# EAGLE board Camera (EAGLE 9.6.2)
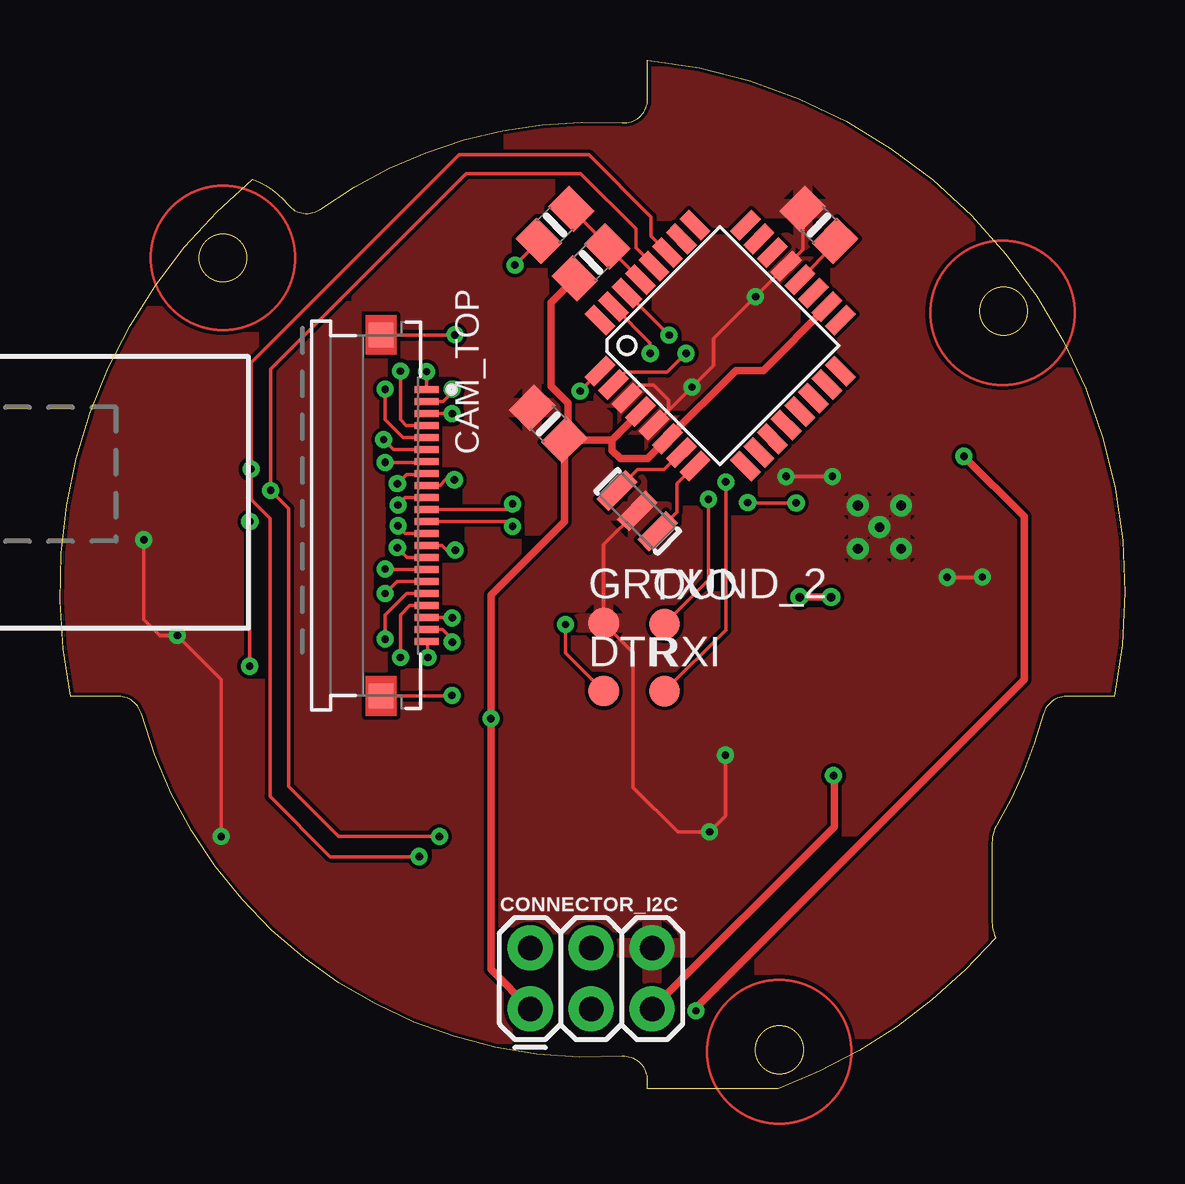
[diagram p0: board, top side]
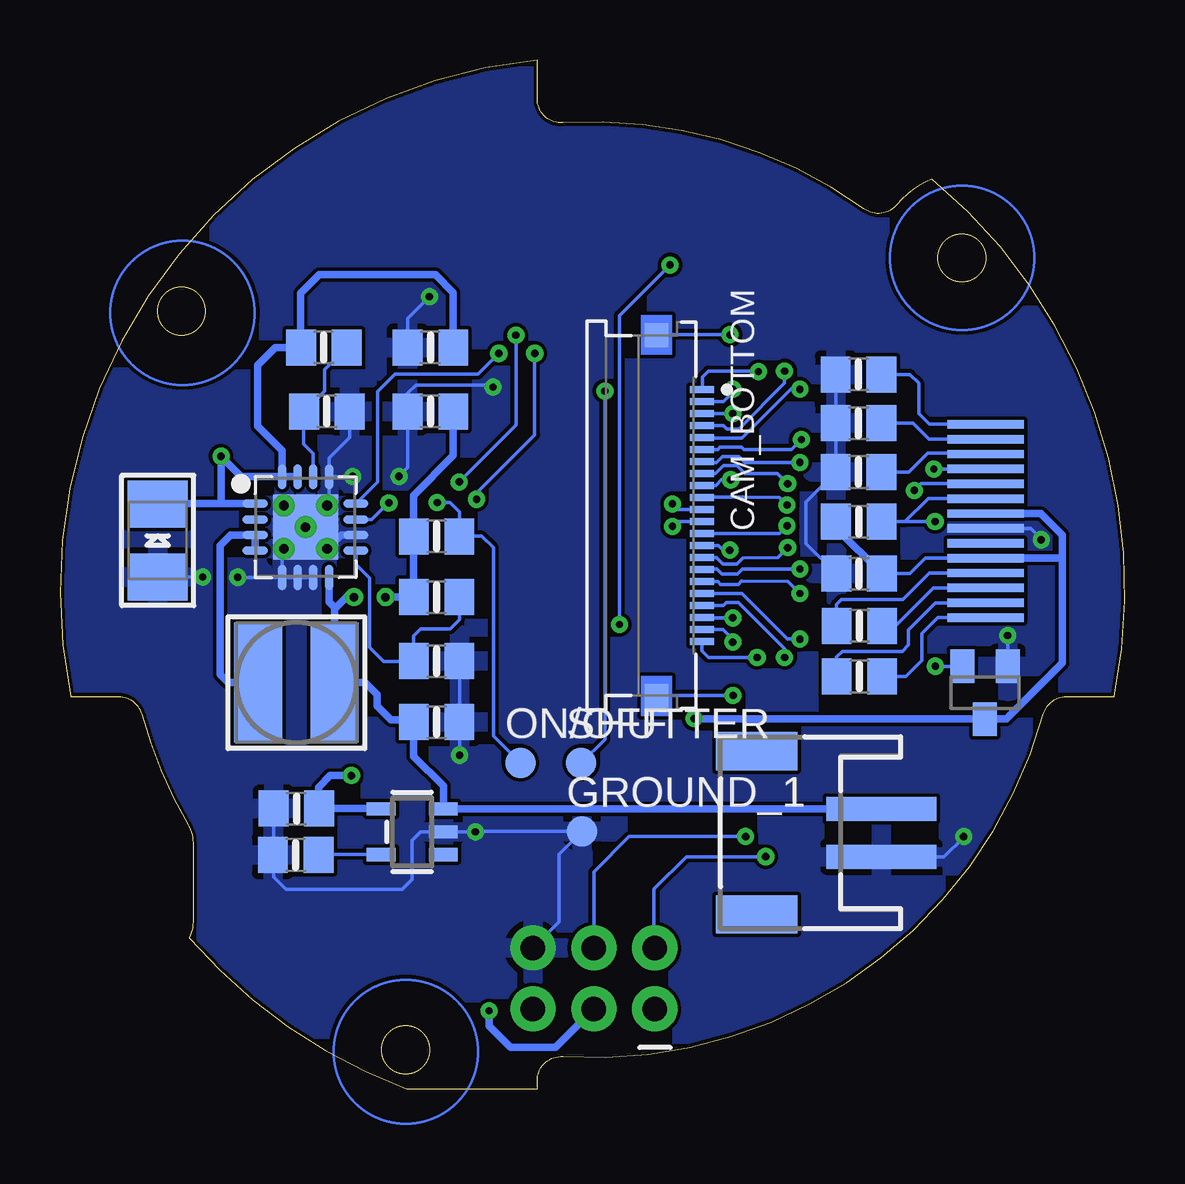
[diagram p1: board, bottom side, seen from below]

Size 44.39 x 42.88 mm. Coordinates in mm from the lower left corner, seen from the top.
Outline: 24.5,41.26 24.5,42.88 arc-96 43.94,16.35 41.96,16.35 arc75 40.99,15.62 arc-15 39.06,11 arc30 38.85,10.25 38.85,6.95 arc26 39,6.3 arc-29 29.95,0 24.5,0 24.5,0.34 arc94 23.43,1.34 arc-78 3.4,15.62 arc75 2.43,16.35 0.45,16.35 arc-62 8.04,37.9 arc-30 9.5,36.85 arc86 10.86,36.67 arc-39 23.43,40.26 arc94 24.5,41.26
Outline: circle at 6.79,34.63 radius 1
Outline: circle at 29.99,1.62 radius 1
Outline: circle at 39.33,32.41 radius 1
Copper layers (1*16): Top 0.035mm / dielectric 1.5mm / Bottom 0.035mm
Design rules "default *": minimum track width 6mil, minimum drill 0.3mm, track to track 6mil, track to pad 6mil, pad to pad 6mil, via to via 6mil, smd to smd 6mil, copper to edge 6mil, drill to drill 6mil, minimum pad ring 10mil, minimum via ring 8mil, stop-mask expansion 4mil, vias tented up to drill 0mil, thermal gap 10mil
Net classes: 0 default: width 0.203 mm; 1 vcc: width 0.254 mm

## Footprints (pad centres in the part's own frame; a part is rotated, then mirrored left to right if it is on the bottom)
JSTPH2 = smd 1 x 4.6: 1 -1,-3.7; 2 1,-3.7 | smd 1.6 x 3.4: NC1 -3.4,1.5; NC2 3.4,1.5
0805-NO = smd 1.24 x 1.5: 1 -0.95,0; 2 0.95,0
EIA3528-21/B-R = smd 1.95 x 2.5: + 1.525,0; - -1.525,0
MOLEX_54548-2271_0 = smd 0.3 x 1: 1 -5.25,0.95; 2 -4.75,0.95; 3 -4.25,0.95; 4 -3.75,0.95; 5 -3.25,0.95; 6 -2.75,0.95; 7 -2.25,0.95; 8 -1.75,0.95; 9 -1.25,0.95; 10 -0.75,0.95; 11 -0.25,0.95; 12 0.25,0.95; 13 0.75,0.95; 14 1.25,0.95; 15 1.75,0.95; 16 2.25,0.95; 17 2.75,0.95; 18 3.25,0.95; 19 3.75,0.95; 20 4.25,0.95; 21 4.75,0.95; 22 5.25,0.95 | smd 1 x 1: MP1 -7.525,-0.95; MP2 7.525,-0.95
2X3 = drill 1.016 pad 1.88: 1 0,0; 2 0,2.54; 3 2.54,0; 4 2.54,2.54; 5 5.08,0; 6 5.08,2.54
B1,27 = smd 1.27 x 1.27: TP 0,0
SOT23 = smd 1 x 1.4: 1 -0.95,-1.1; 2 0.95,-1.1; 3 0,1.1
INDUCTOR_5X5MM_TDK_VLC5045 = smd 2 x 5: P$1 -1.6,0; P$2 1.6,0
UG-2832HSWEG02_WRAPUNDER = smd 3.2 x 0.35 bottom: 1 -2.03,-5.3; 2 -2.03,-4.68; 3 -2.03,-4.06; 4 -2.03,-3.44; 5 -2.03,-2.82; 6 -2.03,-2.2; 7 -2.03,-1.58; 8 -2.03,-0.96; 9 -2.03,-0.34; 10 -2.03,0.28; 11 -2.03,0.9; 12 -2.03,1.52; 13 -2.03,2.14; 14 -2.03,2.76
RESONATOR-SMD = smd 0.7 x 1.7: 1 -1.2,0; 2 0,0; 3 1.2,0
PVQFN-16 = smd 1.05 x 0.35: 1 -2.1,0.975; 2 -2.1,0.325; 3 -2.1,-0.325; 4 -2.1,-0.975; 9 2.1,-0.975; 10 2.1,-0.325; 11 2.1,0.325; 12 2.1,0.975 | smd 0.35 x 1.05: 5 -0.975,-2.1; 6 -0.325,-2.1; 7 0.325,-2.1; 8 0.975,-2.1; 13 0.975,2.1; 14 0.325,2.1; 15 -0.325,2.1; 16 -0.975,2.1 | drill 0.4: P$18 0,0; P$19 -0.9,0.9; P$20 0.9,0.9; P$21 0.9,-0.9; P$22 -0.9,-0.9 | smd 2.7 x 2.7: THERMAL 0,0
SOT23-5 = smd 0.55 x 1.2: 1 -0.95,-1.3; 2 0,-1.3; 3 0.95,-1.3; 4 0.95,1.3; 5 -0.95,1.3
TQFP32-08 = smd 1.27 x 0.559: 1 -4.293,2.8; 2 -4.293,2; 3 -4.293,1.2; 4 -4.293,0.4; 5 -4.293,-0.4; 6 -4.293,-1.2; 7 -4.293,-2; 8 -4.293,-2.8; 17 4.293,-2.8; 18 4.293,-2; 19 4.293,-1.2; 20 4.293,-0.4; 21 4.293,0.4; 22 4.293,1.2; 23 4.293,2; 24 4.293,2.8 | smd 0.559 x 1.27: 9 -2.8,-4.293; 10 -2,-4.293; 11 -1.2,-4.293; 12 -0.4,-4.293; 13 0.4,-4.293; 14 1.2,-4.293; 15 2,-4.293; 16 2.8,-4.293; 25 2.8,4.293; 26 2,4.293; 27 1.2,4.293; 28 0.4,4.293; 29 -0.4,4.293; 30 -1.2,4.293; 31 -2,4.293; 32 -2.8,4.293

## Placement (x,y rotation side)
B1  1.8-5V  [JSTPH2]  13.85,10.67 90 bottom
C1  10uF  [0805-NO]  28.95,28.23 180 bottom
C2  2.2uF  [0805-NO]  28.95,30.9 180 bottom
C3  1uF  [0805-NO]  11.07,17.18 0 bottom
C4  0.1uF  [0805-NO]  28.7,15.28 0 bottom
C5  100uF/6V  [EIA3528-21/B-R]  40.32,22.85 90 bottom
C6  10µF  [0805-NO]  34.54,11.67 180 bottom
C7  1uF  [0805-NO]  11.07,19.29 0 bottom
C8  10uF  [0805-NO]  11.08,21.46 0 bottom
C9  10uF  [0805-NO]  11.11,29.77 0 bottom
C10  10uF  [0805-NO]  11.11,27.74 0 bottom
C11  0.1uF  [0805-NO]  31.63,36 315 top
C12  0.1uF  [0805-NO]  20.35,27.71 315 top
C13  0.1uF  [0805-NO]  20.63,36 225 top
CAM_BOTTOM  MOLEX_54548-2271MOLEX_54548-2271_0_0  [MOLEX_54548-2271_0]  18.58,23.9 270 bottom
CAM_TOP  MOLEX_54548-2271MOLEX_54548-2271_0_0  [MOLEX_54548-2271_0]  14.33,23.9 270 top
CONNECTOR_I2C  FEMALE 2x3  [2X3]  19.6,3.33 0 top
DTR  TPB1,27  [B1,27]  22.67,16.58 0 top
GROUND_1  TPB1,27  [B1,27]  22.64,10.72 0 bottom
GROUND_2  TPB1,27  [B1,27]  22.67,19.41 0 top
IC5  APX803  [SOT23]  5.84,16.5 180 bottom
L1  VLC5045-6.8uH  [INDUCTOR_5X5MM_TDK_VLC5045]  34.54,16.93 180 bottom
LCD1  OLED 128x32  [UG-2832HSWEG02_WRAPUNDER]  7.84,24.94 0 top
ON/OFF  TPB1,27  [B1,27]  25.21,13.58 0 bottom
Q2  8MHz  [RESONATOR-SMD]  24.06,24.08 135 top
R1  1.87Mohm  [0805-NO]  28.7,20.49 180 bottom
R2  340K  [0805-NO]  28.7,17.82 180 bottom
R3  1.87Mohm  [0805-NO]  33.4,30.9 180 bottom
R4  200K  [0805-NO]  33.27,28.23 180 bottom
R8  2k  [0805-NO]  34.57,9.74 180 bottom
R9  10K  [0805-NO]  22.13,34.44 225 top
R13  340K  [0805-NO]  28.7,23.03 0 bottom
R16  390K  [0805-NO]  11.11,25.71 0 bottom
R17  10K  [0805-NO]  11.1,23.63 180 bottom
RXI  TPB1,27  [B1,27]  25.21,16.57 0 top
SHUTTER  TPB1,27  [B1,27]  22.67,13.58 0 bottom
TXO  TPB1,27  [B1,27]  25.21,19.37 0 top
U1  TPS61090RSAR  [PVQFN-16]  34.16,23.41 0 bottom
U2  MCP73831T-2ACI/OT  [SOT23-5]  29.71,10.71 90 bottom
U3  ATMEGA328  [TQFP32-08]  27.52,30.97 45 top

## Library data of the parts
B1 C1-C13 L1 LCD1 R1-R4 R8 R9 R13 R16 R17 U1 U2 = microbuilder
CAM_BOTTOM CAM_TOP = Molex - 54548-2271; CIIVA_IDS: 3405268; CIRCUITS_LOADED: 22; COMPONENT_LINK_1_DESCRIPTION: Manufacturer URL; COMPONENT_LINK_1_URL: http://www.molex.com/molex/index.jsp; COMPONENT_LINK_3_DESCRIPTION: Package Specification; COMPONENT_LINK_3_URL: http://www.molex.com/pdm_docs/sd/545482171_sd.pdf; CONTACT_POSITION: Bottom; CURRENT_MAX_PER_CONTACT: 0.5A; DATASHEET: http://www.molex.com/webdocs/datasheets/pdf/en-us/0545482271_FFC_FPC_CONNECTORS.pdf; DURABILITY_MATING_CYCLES_MAX: 20; ENTRY_ANGLE: 90degrees Angle; FOOTPRINT_VARIANT_NAME_0: Manufacturer Recommended; IMPORTED: yes; IMPORTED_FROM: vault; IMPORT_TS: 1521842921; MATED_HEIGHT: 1.20mm; MATERIAL___METAL: Phosphor Bronze; MATERIAL___PLATING_MATING: Gold; MATERIAL___PLATING_TERMINATION: Tin; MF: Molex; MOUNTING_TECHNOLOGY: Surface Mount; MPN: 54548-2271; NUMBER_OF_ROWS: 1; ORIENTATION: Right Angle; PACKAGE: 54548-2271; PACKAGE_DESCRIPTION: 22-Lead FPC Connector, Pitch 0.5 mm; PACKAGE_VERSION: Rev. N, 06/2008; PACKING: Tape and Reel; PCB_LOCATOR: No; PCB_RETENTION: Yes; PITCH___MATING_INTERFACE: 0.50mm; POLARIZED_TO_PCB: Yes; PREFIX: J; RELEASE_DATE: 1411372733; ROHS: Yes; STACKABLE: No; VAULT_GUID: 920E7395-0F54-4537-85AD-D56E07D5A003; VAULT_REVISION: 20E50B2D-1E80-4777-BC1D-DF1542527B45; VOLTAGE_MAX: 50V
CONNECTOR_I2C = SparkFun-Connectors; PROD_ID: CONN-11566
DTR GROUND_1 GROUND_2 ON/OFF RXI SHUTTER TXO = testpad
IC5 = adafruit
Q2 U3 = SparkFun

## Nets
3.3V: C8.2 C12.2 CONNECTOR_I2C.1 IC5.3 LCD1.5 LCD1.8 R9.2 R17.2 U3.4 U3.6 U3.18
5.0V: C2.1 C5.+ CONNECTOR_I2C.3 R3.2 U1.1 U1.15 U1.16
!OLED_RST: IC5.2 LCD1.9 R17.1
A0: U3.23
A1: U3.24
A2: U3.25
A3: U3.26
A4/SDA: CONNECTOR_I2C.2 LCD1.11 U3.27
A5/SCL: CONNECTOR_I2C.4 LCD1.10 U3.28
AREF: C11.2 U3.20
D2: U3.32
D3: SHUTTER.TP U3.1
D4: U1.12 U3.2
D5: U3.9
D6: U3.10
D7: U3.11
D8: U3.12
D9: U3.13
D10: U3.14
DTR: C13.2 DTR.TP
ENABLE: ON/OFF.TP R13.2 U1.11
GND: B1.1 C1.2 C2.2 C4.2 C5.- C6.2 C8.1 C9.1 C10.1 C11.1 C12.1 CONNECTOR_I2C.6 GROUND_1.TP GROUND_2.TP IC5.1 LCD1.7 Q2.2 R2.1 R4.1 R8.2 R16.1 U1.5 U1.6 U1.7 U1.10 U1.13 U1.P$18 U1.P$19 U1.P$20 U1.P$21 U1.P$22 U1.THERMAL U2.2 U3.3 U3.5 U3.21
MISO: U3.16
MOSI: U3.15
N$1: L1.P$2 U1.3 U1.4
N$2: CAM_BOTTOM.1 CAM_TOP.1
N$3: R1.1 R2.2 U1.9
N$4: CAM_BOTTOM.2 CAM_TOP.2
N$5: R3.1 R4.2 U1.14
N$6: CAM_BOTTOM.3 CAM_TOP.3
N$7: CAM_BOTTOM.4 CAM_TOP.4
N$8: R8.1 U2.5
N$9: CAM_BOTTOM.5 CAM_TOP.5
N$10: CAM_BOTTOM.6 CAM_TOP.6
N$11: C3.2 LCD1.1
N$12: C3.1 LCD1.2
N$13: C7.2 LCD1.3
N$14: C7.1 LCD1.4
N$15: C10.2 LCD1.13
N$16: LCD1.12 R16.2
N$17: C9.2 LCD1.14
N$18: Q2.1 U3.8
N$19: Q2.3 U3.7
N$20: CAM_BOTTOM.7 CAM_TOP.7
N$21: CAM_BOTTOM.8 CAM_TOP.8
N$22: CAM_BOTTOM.9 CAM_TOP.9
N$23: CAM_BOTTOM.10 CAM_TOP.10
N$24: CAM_BOTTOM.11 CAM_TOP.11
N$25: CAM_BOTTOM.12 CAM_TOP.12
N$26: CAM_BOTTOM.13 CAM_TOP.13
N$27: CAM_BOTTOM.14 CAM_TOP.14
N$28: CAM_BOTTOM.15 CAM_TOP.15
N$29: CAM_BOTTOM.16 CAM_TOP.16
N$30: CAM_BOTTOM.17 CAM_TOP.17
N$31: CAM_BOTTOM.18 CAM_TOP.18
N$32: CAM_BOTTOM.19 CAM_TOP.19
N$33: CAM_BOTTOM.20 CAM_TOP.20
N$34: CAM_BOTTOM.21 CAM_TOP.21
N$35: CAM_BOTTOM.22 CAM_TOP.22
N$36: CAM_BOTTOM.MP1 CAM_TOP.MP1
N$37: CAM_BOTTOM.MP2 CAM_TOP.MP2
RESET: C13.1 R9.1 U3.29
RXI: RXI.TP U3.30
SCK: U3.17
TXO: TXO.TP U3.31
VBAT: B1.2 C1.1 C4.1 L1.P$1 R1.2 R13.1 U1.8 U2.3
VBREF: LCD1.6
VDD1: C6.1 CONNECTOR_I2C.5 U2.4

## Tracks (layer width: path | path; a pad name or v marks a point on that pad's centre or on a via)
3.3V  (via drill 0.3)
  Top 0.305: CONNECTOR_I2C.1 17.96,4.97 v17.96,15.42 17.96,20.58 21.02,23.64 21.02,26.84 | 21.02,26.84 C12.2 23.02,27.04 | U3.4 23.02,27.04 | 23.02,27.04 23.02,26.6 23.36,26.26 24.5,26.26 U3.6 28.18,29.94 29.31,29.94 U3.18 | R9.2 20.46,32.77 20.46,29.28 21.17,28.57 21.17,27 21.02,26.84
  Bottom 0.152: C8.2 8.98,21.46 8.32,22.12 LCD1.5
  Bottom 0.305: v17.96,15.42 17.97,15.41 17.97,15.4 IC5.3 4.95,15.4 2.61,17.75 2.61,22.12 | 2.61,22.12 2.61,23.08 3.5,23.98 LCD1.8 | LCD1.5 2.61,22.12 | R17.2 12.05,23.38 C8.2
5.0V  (via drill 0.3)
  Top 0.305: v26.51,3.25 26.51,3.37 40.2,17.06 40.2,23.84 v37.68,26.36
  Bottom 0.305: U1.1 37.68,24.38 | 37.68,24.38 40.31,24.38 C5.+ | U1.16 35.13,26.6 36.16,27.63 36.16,30.17 35.43,30.9 R3.2 34.36,30.91 34.36,33.17 33.6,33.93 28.74,33.93 28,33.19 C2.1 | U1.16 U1.15 | CONNECTOR_I2C.3 23.75,1.72 25.62,1.72 26.51,2.61 v26.51,3.25 | 37.68,24.38 v37.68,26.36 36.83,25.51 U1.16
!OLED_RST  (via drill 0.3)
  Top 0.152: v7.9,17.61 7.9,23.63 v7.92,23.64
  Bottom 0.152: LCD1.9 8.21,24.6 9.17,23.63 R17.1 v7.92,23.64 | IC5.2 7.88,17.6 7.89,17.6 v7.9,17.61
A4/SDA  (via drill 0.3)
  Top 0.152: U3.27 24.65,35.54 24.65,36.33 22.04,38.93 16.63,38.93 7.97,30.27 v7.97,25.83 7.97,24.56 8.75,23.77 8.75,12.19 11.27,9.67 v14.98,9.67
  Bottom 0.152: LCD1.11 7.86,25.84 7.86,25.83 v7.97,25.83 | v14.98,9.67 18.28,9.67 19.63,8.33 19.63,5.89 CONNECTOR_I2C.2
A5/SCL  (via drill 0.3)
  Top 0.152: U3.28 24,35.05 24,35.84 21.7,38.15 16.93,38.15 8.78,29.99 v8.78,24.94 9.54,24.18 9.54,12.59 11.62,10.51 v15.82,10.51
  Bottom 0.152: v8.78,24.94 8.5,25.22 LCD1.10 | CONNECTOR_I2C.4 22.14,9.03 20.67,10.51 v15.82,10.51
AREF
  Top 0.152: U3.20 32.3,35.19 C11.2
D3  (via drill 0.3)
  Top 0.152: v21.68,29.08 22.5,29.9 U3.1
  Bottom 0.152: SHUTTER.TP 21.68,14.57 v21.68,29.08
D4  (via drill 0.3)
  Top 0.152: v26.1,30.65 25.3,29.86 23.58,29.86 U3.2
  Bottom 0.152: U1.12 31.16,25.29 31.16,29.05 30.42,29.79 26.97,29.79 v26.1,30.65
DTR  (via drill 0.3)
  Top 0.152: DTR.TP 21.07,18.17 v21.07,19.35 | v18.96,34.34 v18.97,34.34 C13.2
  Bottom 0.152: v21.07,19.35 21.07,32.23 v18.96,34.34
ENABLE  (via drill 0.3)
  Top 0.152: v30.69,24.42 28.68,24.42 v28.67,24.43
  Bottom 0.152: ON/OFF.TP 26.33,14.71 26.33,22.55 26.81,23.03 R13.2 27.75,24.04 28.13,24.43 v28.67,24.43 | U1.11 31.4,23.73 30.7,24.43 v30.69,24.42
GND  (via drill 0.3)
  Top 0.152: v30.27,25.52 v32.2,25.52 | U3.3 24.18,29.33 24.73,29.33 25.37,28.7 25.37,28.25 U3.5 v26.34,29.24 27.25,30.14 27.25,31.27 v29,33.02 U3.21 30.96,34.98 C11.1 | v36.99,21.32 38.43,21.32 v38.45,21.33 | v6.72,10.51 6.72,17.06 v4.89,18.89 4.16,18.89 3.5,19.55 v3.5,22.88 | v27.74,13.9 27.74,11.36 v27.08,10.7 25.76,10.7 23.89,12.57 23.89,18.18 GROUND_2.TP 22.67,22.69 Q2.2
  Bottom 0.152: v27.08,10.7 27.09,10.71 | 27.09,10.71 U2.2 29.36,10.71 29.71,10.36 29.71,8.73 30.14,8.3 34.97,8.3 35.49,8.82 35.49,9.77 | U1.5 35.13,22.43 U1.P$22 | U1.7 U1.6 U1.5 | U1.THERMAL 33.18,24.38 U1.13 | U1.13 33.18,26.29 32.32,27.15 R4.1 | v30.27,25.52 29.9,25.89 C1.2 29.9,28.99 29.56,29.33 26.43,29.33 v26.34,29.24 | v32.2,25.52 33.17,25.52 U1.13 | C2.2 29.9,32.11 v29,33.02 | U1.5 35.13,21.32 v36.99,21.32 | v38.45,21.33 40.31,21.33 C5.- | R8.2 35.49,9.77 | 35.49,9.77 C6.2 | GROUND_1.TP 27.08,10.72 27.09,10.71 | CONNECTOR_I2C.6 23.59,6.96 23.59,9.77 GROUND_1.TP | GROUND_1.TP | B1.1 7.54,9.67 6.72,10.48 v6.72,10.51 | v4.89,18.89 IC5.1 | C9.1 C10.1 R16.1 13.3,24.45 13.3,22.73 C8.1 | LCD1.7 3.92,23.36 3.5,22.93 v3.5,22.88 | R2.1 C4.2 27.75,13.92 v27.75,13.91 v27.74,13.9
  Bottom 0.305: U1.10 32.68,23.08 U1.P$21 U1.THERMAL | U1.THERMAL U1.P$20 | U1.THERMAL 34.49,23.41 34.66,23.24 35.06,23.63 U1.P$19 | U1.THERMAL U1.P$22
  pour Bottom: -0.42,-0.56 45.3,-0.56 45.3,42.62 -0.42,42.62
  pour Top: -2.96,-3.1 -2.96,45.16 47.84,45.16 47.84,-3.1
N$1
  Bottom 0.305: L1.P$2 37.37,16.93 37.71,17.27 37.71,22.65 37.28,23.08 U1.3 U1.4
N$2  (via drill 0.3)
  Top 0.152: CAM_TOP.1 v15.28,29.89
  Bottom 0.152: CAM_BOTTOM.1 17.62,29.16 17.62,29.66 17.36,29.92 15.31,29.92 v15.28,29.89
N$3
  Bottom 0.152: U1.9 32.06,21.85 31.49,21.28 31.49,18.38 30.9,17.8 29.67,17.8 R2.2 29.65,18.88 29.35,19.17 28.13,19.17 27.75,19.56 R1.1
N$4  (via drill 0.3)
  Top 0.152: CAM_TOP.2 15.97,28.65 16.35,29.03 v16.35,29.15
  Bottom 0.152: v16.35,29.15 16.35,29.03 16.73,28.65 CAM_BOTTOM.2
N$5
  Bottom 0.152: U1.14 33.83,26.47 34.23,26.87 34.23,28.22 R4.2 33.37,29.09 33.37,29.98 R3.1
N$6  (via drill 0.3)
  Top 0.152: CAM_TOP.3 v16.35,28.14
  Bottom 0.152: v16.35,28.14 CAM_BOTTOM.3
N$7  (via drill 0.3)
  Top 0.152: CAM_TOP.4 14.43,27.65 14.19,27.88 v14.19,29.92
  Bottom 0.152: v14.19,29.92 14.19,29.41 16.09,27.5 16.6,27.5 16.75,27.65 CAM_BOTTOM.4
N$8
  Bottom 0.152: U2.5 33.6,9.76 R8.1
N$9  (via drill 0.3)
  Top 0.152: CAM_TOP.5 14.29,27.15 13.55,27.88 v13.55,29.15
  Bottom 0.152: v13.55,29.15 13.94,29.15 15.97,27.12 17.61,27.12 CAM_BOTTOM.5
N$10  (via drill 0.3)
  Top 0.152: CAM_TOP.6 13.9,26.65 v13.49,27.06
  Bottom 0.152: v13.49,27.06 13.9,26.65 15.89,26.64 15.99,26.74 16.88,26.74 16.98,26.65 CAM_BOTTOM.6
N$11
  Bottom 0.152: C3.2 9.14,17.18 8.47,17.85 8.47,18.97 7.81,19.64 LCD1.1
N$12
  Bottom 0.152: LCD1.2 7.9,20.26 9.03,19.12 9.03,18.49 9.29,18.23 11.78,18.23 12.02,17.99 C3.1
N$13
  Bottom 0.152: C7.2 9.57,19.29 7.99,20.88 LCD1.3
N$14
  Bottom 0.152: LCD1.4 8.16,21.5 9.26,20.39 11.83,20.39 12.03,20.19 C7.1
N$15
  Bottom 0.152: C10.2 8.84,27.74 8.17,27.08 LCD1.13
N$16
  Bottom 0.152: R16.2 9,25.71 8.22,26.49 5.85,26.49 LCD1.12
N$17
  Bottom 0.152: C9.2 8.96,29.77 8.6,29.41 8.6,28.14 8.16,27.7 LCD1.14
N$18
  Top 0.152: U3.8 25.72,25.22 | 25.72,25.22 | Q2.1 25.72,24.04 25.72,25.22
N$19
  Top 0.152: U3.7 25.17,25.8 24.08,25.8 Q2.3
N$20  (via drill 0.3)
  Top 0.152: CAM_TOP.7 15.24,26.11 v13.55,26.11
  Bottom 0.152: v13.55,26.11 15.84,26.11 16.09,26.36 16.78,26.36 17.03,26.11 17.59,26.11 CAM_BOTTOM.7
N$21  (via drill 0.3)
  Top 0.152: CAM_TOP.8 15.23,25.6 14.44,25.6 v14.06,25.22
  Bottom 0.152: CAM_BOTTOM.8 17.06,25.65 16.73,25.98 16.17,25.98 15.84,25.65 14.49,25.65 v14.06,25.22
N$22  (via drill 0.3)
  Top 0.152: CAM_TOP.9 15.85,25.15 16.08,25.38 v16.44,25.38
  Bottom 0.152: v16.44,25.38 16.81,25.38 17.05,25.15 CAM_BOTTOM.9
N$23  (via drill 0.3)
  Top 0.152: CAM_TOP.10 14.38,24.65 14.09,24.35 v14.09,24.33
  Bottom 0.152: v14.09,24.33 14.41,24.65 15.92,24.66 17.62,24.66 CAM_BOTTOM.10
N$24  (via drill 0.3)
  Top 0.152: CAM_TOP.11 18.63,24.15 v18.86,24.38
  Bottom 0.152: CAM_BOTTOM.11 18.63,24.15 v18.86,24.38
N$25  (via drill 0.3)
  Top 0.152: CAM_TOP.12 18.66,23.65 v18.86,23.44
  Bottom 0.152: CAM_BOTTOM.12 18.66,23.65 v18.86,23.44
N$26  (via drill 0.3)
  Top 0.152: CAM_TOP.13 14.38,23.15 14.09,23.44 v14.09,23.46
  Bottom 0.152: 17.62,23.13 CAM_BOTTOM.13 14.41,23.15 v14.09,23.46
N$27  (via drill 0.3)
  Top 0.152: CAM_TOP.14 15.92,22.65 16.12,22.45 v16.48,22.45
  Bottom 0.152: v16.48,22.45 16.75,22.45 16.95,22.65 CAM_BOTTOM.14
N$28  (via drill 0.3)
  Top 0.152: CAM_TOP.15 14.47,22.15 v14.06,22.55
  Bottom 0.152: CAM_BOTTOM.15 17.04,22.15 16.75,21.86 16.17,21.86 15.92,22.12 14.47,22.14 v14.06,22.55
N$29  (via drill 0.3)
  Top 0.152: CAM_TOP.16 13.57,21.65 v13.55,21.66
  Bottom 0.152: v13.55,21.66 15.94,21.66 16.15,21.46 16.81,21.46 17.01,21.66 17.62,21.66 CAM_BOTTOM.16
N$30  (via drill 0.3)
  Top 0.152: CAM_TOP.17 14.06,21.15 v13.55,20.64
  Bottom 0.152: v13.55,20.64 14.06,21.15 15.99,21.15 16.12,21.03 16.86,21.03 16.98,21.15 CAM_BOTTOM.17
N$31  (via drill 0.3)
  Top 0.152: CAM_TOP.18 14.44,20.64 13.55,19.76 v13.55,18.74
  Bottom 0.152: CAM_BOTTOM.18 15.97,20.65 14.06,18.74 v13.55,18.74
N$32  (via drill 0.3)
  Top 0.152: CAM_TOP.19 15.27,20.14 14.57,20.14 14.19,19.76 v14.19,17.98
  Bottom 0.152: v14.19,17.98 14.19,18.36 16.1,20.27 16.62,20.27 16.75,20.15 CAM_BOTTOM.19
N$33  (via drill 0.3)
  Top 0.152: CAM_TOP.20 16.33,19.65 v16.35,19.63
  Bottom 0.152: v16.35,19.63 17.62,19.63 CAM_BOTTOM.20
N$34  (via drill 0.3)
  Top 0.152: CAM_TOP.21 15.94,19.15 16.35,18.74 v16.35,18.61
  Bottom 0.152: v16.35,18.61 16.35,18.74 16.75,19.15 CAM_BOTTOM.21
N$35  (via drill 0.3)
  Top 0.152: CAM_TOP.22 15.33,18.59 v15.33,17.98
  Bottom 0.152: v15.33,17.98 17.36,17.98 17.63,18.25 CAM_BOTTOM.22
N$36  (via drill 0.3)
  Top 0.152: CAM_TOP.MP1 16.43,31.42 16.45,31.44 v16.46,31.43
  Bottom 0.152: v16.46,31.43 CAM_BOTTOM.MP1
N$37  (via drill 0.3)
  Top 0.152: CAM_TOP.MP2 16.34,16.37 16.35,16.38 v16.34,16.39
  Bottom 0.152: v16.34,16.39 19.51,16.39 CAM_BOTTOM.MP2
RESET
  Top 0.152: C13.1 22.8,35.18 R9.1 24.19,33.73 U3.29
RXI  (via drill 0.3)
  Top 0.152: RXI.TP 27.75,19.12 v27.75,25.29 | v25.39,31.41 25.38,31.41 U3.30
  Bottom 0.152: v27.75,25.29 25.39,27.65 v25.39,31.41
TXO  (via drill 0.3)
  Top 0.152: TXO.TP 27.04,21.2 27.04,24.58 v27.03,24.57 | v24.6,30.65 24.6,31.08 23.09,32.59 U3.31
  Bottom 0.152: v27.03,24.57 27.03,24.82 24.6,27.25 v24.6,30.65
VBAT  (via drill 0.35)
  Top 0.305: v30.83,20.49 v32.15,20.49
  Bottom 0.305: B1.2 U2.3 | U2.3 | C1.1 28,26.39 29.66,24.73 29.66,23.04 R13.1 R1.2 30.64,20.49 30.65,20.49 v30.83,20.49 | U1.8 33.18,20.28 32.93,20.03 | 32.88,16.99 L1.P$1 | L1.P$1 31.68,16.93 31.18,16.43 31.18,15.95 30.6,15.36 29.73,15.36 C4.1 29.65,13.85 28.41,12.61 U2.3 | v32.15,20.49 32.45,20.49 32.88,20.06 32.88,20.09 32.93,20.03 | L1.P$1 32.94,20.03 32.93,20.03
VDD1  (via drill 0.3)
  Top 0.305: CONNECTOR_I2C.5 32.27,10.92 32.27,13.02 v32.25,13.05
  Bottom 0.152: U2.4 31.03,11.67
  Bottom 0.305: 31.03,11.67 C6.1 33.62,11.7 33.62,12.57 33.14,13.05 v32.25,13.05
(copper drawn outside any net)
  shapes: Bottom circle x3, Top circle x3